# Altium PCB PCB1.PcbDoc (part 2 of 2)
Units mm, origin at the board's own origin, x right, y up, seen from the top; angles counter-clockwise.
Board outline 65.4 x 65.4 mm, 4 copper layers (Top Layer, Internal Plane 1, Signal Layer 1, Bottom Layer), stack 0.778 mm thick; 93 components, 59 nets, 348 pads, 1252 vias.
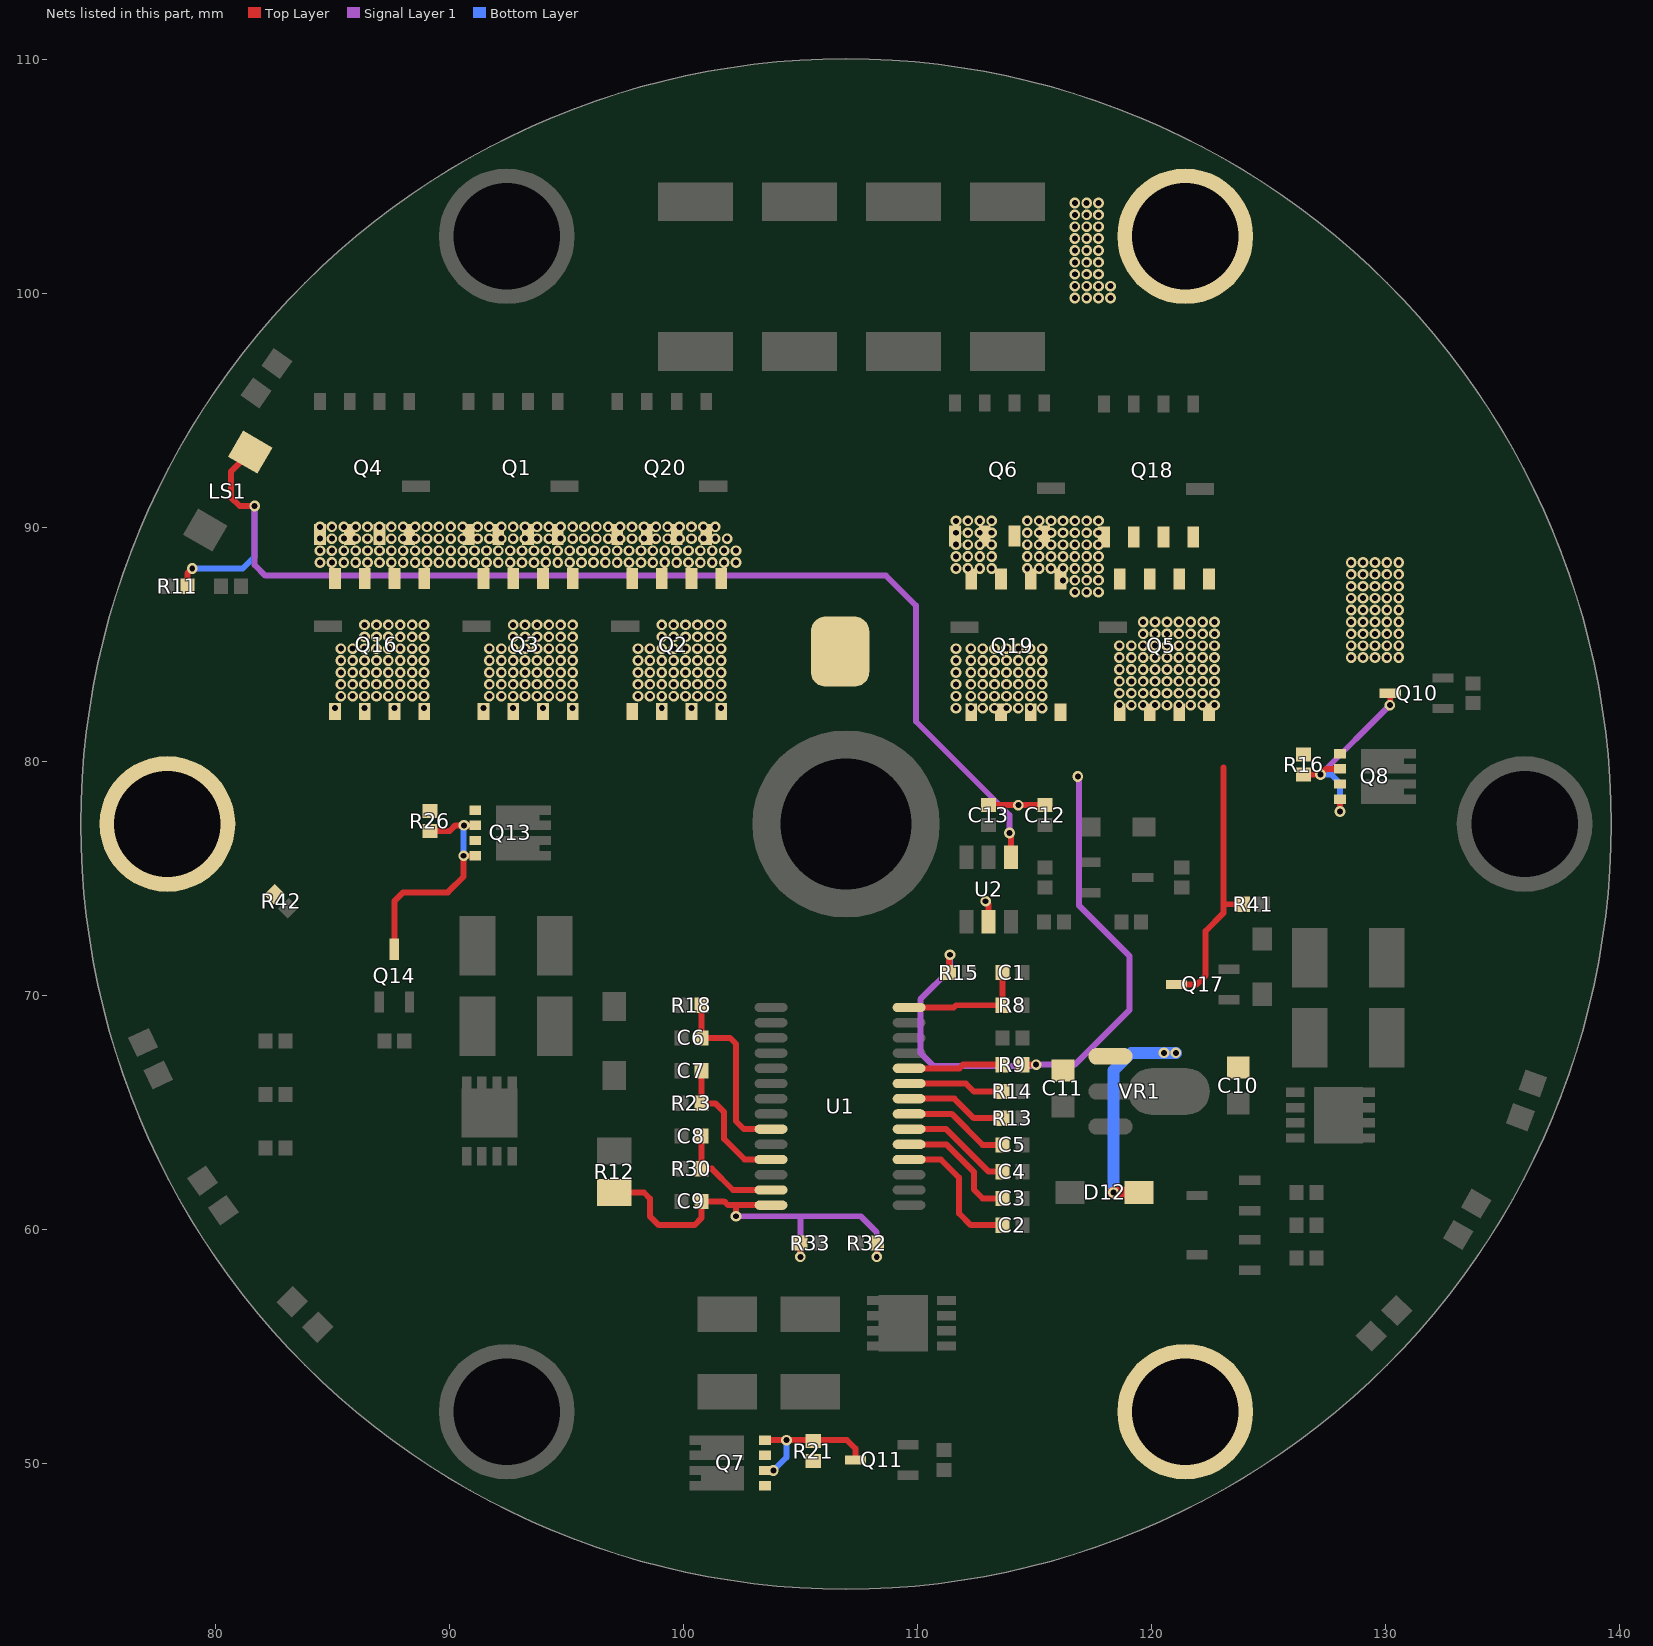
[diagram p4: the nets of this part, all layers, seen from the top]

## Via types
v1: diameter 0.457, hole 0.254, Top Layer to Bottom Layer, tented both sides, 1252 vias

## Nets (pads, with @x,y where several pads share a name; then routed paths per layer and width w, separated by ;. In a path a pad name is that pad's centre, name@x,y a point inside that pad or via, vN(x,y) a via of type N, cw(c..) or ccw(c..) an arc to the next point about the centre after c; other vN are vias at no path point) (continued)
NetLS1_1: LS1.1 R11.1 U2.4 | length 53.3
  Top Layer w0.254: R11.1@78.784,87.503 78.784,88.055 v1(78.994,88.265) ; LS1.1@81.48,93.234 80.645,92.399 80.645,91.313 81.026,90.932 v1(81.661,90.932) ; v1(113.919,76.962) 113.98,76.901 U2.4@113.98,75.924
  Signal Layer 1 w0.254: v1(81.661,90.932) 81.661,88.413 82.119,87.955 108.645,87.955 109.926,86.674 109.926,81.721 113.919,77.728 v1(113.919,76.962)
  Bottom Layer w0.254: v1(78.994,88.265) 81.153,88.265 81.661,88.773 v1(81.661,90.932)
NetQ1_5: Q1.5 Q1.6 Q1.7 Q1.8 Q2.5 Q2.6 Q2.7 Q2.8 Q3.5 Q3.6 Q3.7 Q3.8 Q4.5 Q4.6 Q4.7 Q4.8 Q5.5 Q5.6 Q5.7 Q5.8 Q6.5 Q6.6 Q6.7 Q6.8 Q16.5 Q16.6 Q16.7 Q16.8 Q18.5 Q18.6 Q18.7 Q18.8 Q19.5 Q19.6 Q19.7 Q19.8 Q20.5 Q20.6 Q20.7 Q20.8
  other v1: 116.713,87.249 117.221,87.249 117.729,87.249 116.205,87.757 116.713,87.757 117.221,87.757 117.729,87.757 111.633,88.265 112.141,88.265 112.649,88.265 113.157,88.265 114.681,88.265 115.189,88.265 115.697,88.265 116.205,88.265 116.713,88.265 117.221,88.265 117.729,88.265 84.455,88.519 84.963,88.519 85.471,88.519 85.979,88.519 86.487,88.519 86.995,88.519 87.503,88.519 88.011,88.519 88.519,88.519 89.027,88.519 89.535,88.519 90.043,88.519 90.551,88.519 91.059,88.519 91.567,88.519 92.075,88.519 92.583,88.519 93.091,88.519 93.599,88.519 94.107,88.519 94.615,88.519 95.123,88.519 95.631,88.519 96.139,88.519 96.647,88.519 97.155,88.519 97.663,88.519 98.171,88.519 98.679,88.519 99.187,88.519 99.695,88.519 100.203,88.519 100.711,88.519 101.219,88.519 101.727,88.519 102.235,88.519 111.633,88.773 112.141,88.773 112.649,88.773 113.157,88.773 114.681,88.773 115.189,88.773 115.697,88.773 116.205,88.773 116.713,88.773 117.221,88.773 117.729,88.773 84.455,89.027 84.963,89.027 85.471,89.027 85.979,89.027 86.487,89.027 86.995,89.027 87.503,89.027 88.011,89.027 88.519,89.027 89.027,89.027 89.535,89.027 90.043,89.027 90.551,89.027 91.059,89.027 91.567,89.027 92.075,89.027 92.583,89.027 93.091,89.027 93.599,89.027 94.107,89.027 94.615,89.027 95.123,89.027 95.631,89.027 96.139,89.027 96.647,89.027 97.155,89.027 97.663,89.027 98.171,89.027 98.679,89.027 99.187,89.027 99.695,89.027 100.203,89.027 100.711,89.027 101.219,89.027 101.727,89.027 102.235,89.027 111.633,89.281 112.141,89.281 112.649,89.281 113.157,89.281 114.681,89.281 115.189,89.281 115.697,89.281 116.205,89.281 116.713,89.281 117.221,89.281 117.729,89.281 84.455,89.535 84.963,89.535 85.471,89.535 85.979,89.535 86.487,89.535 86.995,89.535 87.503,89.535 88.011,89.535 88.519,89.535 89.027,89.535 89.535,89.535 90.043,89.535 90.551,89.535 91.186,89.535 91.694,89.535 92.202,89.535 92.71,89.535 93.218,89.535 93.726,89.535 94.234,89.535 94.742,89.535 95.25,89.535 95.758,89.535 96.266,89.535 96.774,89.535 97.282,89.535 97.79,89.535 98.298,89.535 98.806,89.535 99.314,89.535 99.822,89.535 100.33,89.535 100.838,89.535 101.346,89.535 101.854,89.535 111.633,89.789 112.141,89.789 112.649,89.789 113.157,89.789 114.681,89.789 115.189,89.789 115.697,89.789 116.205,89.789 116.713,89.789 117.221,89.789 117.729,89.789 84.455,90.043 84.963,90.043 85.471,90.043 85.979,90.043 86.487,90.043 86.995,90.043 87.503,90.043 88.011,90.043 88.519,90.043 89.027,90.043 89.535,90.043 90.043,90.043 90.551,90.043 91.186,90.043 91.694,90.043 92.202,90.043 92.71,90.043 93.218,90.043 93.726,90.043 94.234,90.043 94.742,90.043 95.25,90.043 95.758,90.043 96.266,90.043 96.774,90.043 97.282,90.043 97.79,90.043 98.298,90.043 98.806,90.043 99.314,90.043 99.822,90.043 100.33,90.043 100.838,90.043 101.346,90.043 111.633,90.297 112.141,90.297 112.649,90.297 113.157,90.297 114.681,90.297 115.189,90.297 115.697,90.297 116.205,90.297 116.713,90.297 117.221,90.297 117.729,90.297
NetQ7_1: Q7.1 Q7.3 R21.2
NetQ7_2: Q7.2 Q7.4 Q11.3 R21.1 | length 6.4
  Top Layer w0.254: Q7.2@103.475,49.713 v1(103.83,49.713) ; Q7.4@103.475,51.013 v1(104.394,51.013) 106.975,51.013 107.333,50.655 Q11.3@107.333,50.165
  Bottom Layer w0.254: v1(103.83,49.713) 104.394,50.277 v1(104.394,51.013)
NetQ8_1: Q8.1 Q8.3 R16.2
NetQ8_2: Q8.2 Q8.4 Q10.3 R16.1 | length 9.1
  Top Layer w0.254: R16.1@126.492,79.458 v1(127.21,79.458) 127.452,79.7 Q8.2@128.046,79.7 ; v1(128.046,77.881) Q8.4@128.046,78.4 ; v1@130.193,82.441 Q10.3@130.193,82.931
  Signal Layer 1 w0.254: v1(127.21,79.458) v1(130.175,82.423)
  Bottom Layer w0.254: v1(127.21,79.458) 127.679,79.458 128.046,79.091 v1(128.046,77.881)
NetQ13_1: Q13.1 Q13.3 R26.2
NetQ13_2: Q13.2 Q13.4 Q14.3 R26.1 | length 10.2
  Top Layer w0.254: Q14.3@87.63,71.991 87.63,74.041 88.011,74.422 89.916,74.422 90.592,75.098 v1(90.592,75.987) Q13.4@91.089,75.987 ; R26.1@89.154,77.045 89.999,77.045 90.241,77.287 v1(90.607,77.287) Q13.2@91.089,77.287
  Bottom Layer w0.254: v1(90.592,75.987) v1@90.592,77.272
NTC: R13.1 U1.8 | length 4.5
  Top Layer w0.254: U1.8@109.63,65.603 111.562,65.603 112.395,64.77 R13.1@113.621,64.77 R13.1@113.494,64.643
P-: pad.0@77.934,77.343 pad.0@106.68,84.709 pad.0@121.434,52.228 pad.0@121.434,102.458 Q2.1 Q2.2 Q2.3 Q2.4 Q3.1 Q3.2 Q3.3 Q3.4 Q5.1 Q5.2 Q5.3 Q5.4 Q16.1 Q16.2 Q16.3 Q16.4 Q17.3 Q19.1 Q19.2 Q19.3 Q19.4 R9.2 R15.2 R41.2 R42.2 | length 38.6
  Top Layer w0.254: R15.2@111.335,70.993 111.335,71.711 v1(111.379,71.755) ; R9.2@114.471,67.056 v1(115.062,67.056) ; Q17.3@121.049,70.485 121.92,70.485 122.301,70.866 122.301,72.771 123.063,73.533 123.063,73.914 ; 123.063,79.756 123.063,73.914 ; R41.2@123.908,73.914 123.063,73.914
  Signal Layer 1 w0.254: v1(111.379,71.755) 111.379,71.12 110.109,69.85 110.109,67.564 110.663,67.01 115.016,67.01 v1(115.062,67.056) 116.713,67.056 119.045,69.388 119.045,71.709 116.886,73.868 116.886,79.329 v1(116.84,79.375)
  other v1: 85.09,82.296 86.36,82.296 87.63,82.296 88.9,82.296 91.44,82.296 92.71,82.296 93.98,82.296 95.25,82.296 99.06,82.296 100.33,82.296 101.6,82.296 111.633,82.296 112.268,82.296 112.776,82.296 113.284,82.296 113.792,82.296 114.3,82.296 114.808,82.296 115.316,82.296 118.618,82.423 119.126,82.423 119.634,82.423 120.142,82.423 120.65,82.423 121.158,82.423 121.666,82.423 122.174,82.423 122.682,82.423 85.344,82.804 85.852,82.804 86.36,82.804 86.868,82.804 87.376,82.804 87.884,82.804 88.392,82.804 88.9,82.804 91.694,82.804 92.202,82.804 92.71,82.804 93.218,82.804 93.726,82.804 94.234,82.804 94.742,82.804 95.25,82.804 98.044,82.804 98.552,82.804 99.06,82.804 99.568,82.804 100.076,82.804 100.584,82.804 101.092,82.804 101.6,82.804 111.633,82.804 112.268,82.804 112.776,82.804 113.284,82.804 113.792,82.804 114.3,82.804 114.808,82.804 115.316,82.804 118.618,82.931 119.126,82.931 119.634,82.931 120.142,82.931 120.65,82.931 121.158,82.931 121.666,82.931 122.174,82.931 122.682,82.931 85.344,83.312 85.852,83.312 86.36,83.312 86.868,83.312 87.376,83.312 87.884,83.312 88.392,83.312 88.9,83.312 91.694,83.312 92.202,83.312 92.71,83.312 93.218,83.312 93.726,83.312 94.234,83.312 94.742,83.312 95.25,83.312 98.044,83.312 98.552,83.312 99.06,83.312 99.568,83.312 100.076,83.312 100.584,83.312 101.092,83.312 101.6,83.312 111.633,83.312 112.268,83.312 112.776,83.312 113.284,83.312 113.792,83.312 114.3,83.312 114.808,83.312 115.316,83.312 118.618,83.439 119.126,83.439 119.634,83.439 120.142,83.439 120.65,83.439 121.158,83.439 121.666,83.439 122.174,83.439 122.682,83.439 85.344,83.82 85.852,83.82 86.36,83.82 86.868,83.82 87.376,83.82 87.884,83.82 88.392,83.82 88.9,83.82 91.694,83.82 92.202,83.82 92.71,83.82 93.218,83.82 93.726,83.82 94.234,83.82 94.742,83.82 95.25,83.82 98.044,83.82 98.552,83.82 99.06,83.82 99.568,83.82 100.076,83.82 100.584,83.82 101.092,83.82 101.6,83.82 111.633,83.82 112.268,83.82 112.776,83.82 113.284,83.82 113.792,83.82 114.3,83.82 114.808,83.82 115.316,83.82 118.618,83.947 119.126,83.947 119.634,83.947 120.142,83.947 120.65,83.947 121.158,83.947 121.666,83.947 122.174,83.947 122.682,83.947 85.344,84.328 85.852,84.328 86.36,84.328 86.868,84.328 87.376,84.328 87.884,84.328 88.392,84.328 88.9,84.328 91.694,84.328 92.202,84.328 92.71,84.328 93.218,84.328 93.726,84.328 94.234,84.328 94.742,84.328 95.25,84.328 98.044,84.328 98.552,84.328 99.06,84.328 99.568,84.328 100.076,84.328 100.584,84.328 101.092,84.328 101.6,84.328 111.633,84.328 112.268,84.328 112.776,84.328 113.284,84.328 113.792,84.328 114.3,84.328 114.808,84.328 115.316,84.328 118.618,84.455 119.126,84.455 119.634,84.455 120.142,84.455 120.65,84.455 121.158,84.455 121.666,84.455 122.174,84.455 122.682,84.455 128.524,84.455 129.032,84.455 129.54,84.455 130.048,84.455 130.556,84.455 85.344,84.836 85.852,84.836 86.36,84.836 86.868,84.836 87.376,84.836 87.884,84.836 88.392,84.836 88.9,84.836 91.694,84.836 92.202,84.836 92.71,84.836 93.218,84.836 93.726,84.836 94.234,84.836 94.742,84.836 95.25,84.836 98.044,84.836 98.552,84.836 99.06,84.836 99.568,84.836 100.076,84.836 100.584,84.836 101.092,84.836 101.6,84.836 111.633,84.836 112.268,84.836 112.776,84.836 113.284,84.836 113.792,84.836 114.3,84.836 114.808,84.836 115.316,84.836 118.618,84.963 119.126,84.963 119.634,84.963 120.142,84.963 120.65,84.963 121.158,84.963 121.666,84.963 122.174,84.963 122.682,84.963 128.524,84.963 129.032,84.963 129.54,84.963 130.048,84.963 130.556,84.963 86.36,85.344 86.868,85.344 87.376,85.344 87.884,85.344 88.392,85.344 88.9,85.344 92.71,85.344 93.218,85.344 93.726,85.344 94.234,85.344 94.742,85.344 95.25,85.344 99.06,85.344 99.568,85.344 100.076,85.344 100.584,85.344 101.092,85.344 101.6,85.344 119.634,85.471 120.142,85.471 120.65,85.471 121.158,85.471 121.666,85.471 122.174,85.471 122.682,85.471 128.524,85.471 129.032,85.471 129.54,85.471 130.048,85.471 130.556,85.471 86.36,85.852 86.868,85.852 87.376,85.852 87.884,85.852 88.392,85.852 88.9,85.852 92.71,85.852 93.218,85.852 93.726,85.852 94.234,85.852 94.742,85.852 95.25,85.852 99.06,85.852 99.568,85.852 100.076,85.852 100.584,85.852 101.092,85.852 101.6,85.852 119.634,85.979 120.142,85.979 120.65,85.979 121.158,85.979 121.666,85.979 122.174,85.979 122.682,85.979 128.524,85.979 129.032,85.979 129.54,85.979 130.048,85.979 130.556,85.979 128.524,86.487 129.032,86.487 129.54,86.487 130.048,86.487 130.556,86.487 128.524,86.995 129.032,86.995 129.54,86.995 130.048,86.995 130.556,86.995 128.524,87.503 129.032,87.503 129.54,87.503 130.048,87.503 130.556,87.503 128.524,88.011 129.032,88.011 129.54,88.011 130.048,88.011 130.556,88.011 128.524,88.519 129.032,88.519 129.54,88.519 130.048,88.519 130.556,88.519 116.713,99.822 117.221,99.822 117.729,99.822 118.237,99.822 116.713,100.33 117.221,100.33 117.729,100.33 118.237,100.33 116.713,100.838 117.221,100.838 117.729,100.838 116.713,101.346 117.221,101.346 117.729,101.346 116.713,101.854 117.221,101.854 117.729,101.854 116.713,102.362 117.221,102.362 117.729,102.362 116.713,102.87 117.221,102.87 117.729,102.87 116.713,103.378 117.221,103.378 117.729,103.378 116.713,103.886 117.221,103.886 117.729,103.886
TOC1: C4.1 U1.6 | length 4.7
  Top Layer w0.254: U1.6@109.63,64.303 111.211,64.303 113.03,62.484 C4.1@113.621,62.484
TOC2: C5.1 U1.7 | length 4.5
  Top Layer w0.254: U1.7@109.63,64.953 111.45,64.953 112.776,63.627 C5.1@113.621,63.627
TOV: C2.1 U1.4 | length 6
  Top Layer w0.254: U1.4@109.63,63.003 110.987,63.003 111.76,62.23 111.76,60.706 112.268,60.198 C2.1@113.621,60.198
TOVD: C3.1 U1.5 | length 5.4
  Top Layer w0.254: U1.5@109.63,63.653 111.222,63.653 112.395,62.48 112.395,61.722 112.776,61.341 C3.1@113.621,61.341
TRH: R14.1 U1.9 | length 4.1
  Top Layer w0.254: U1.9@109.63,66.253 112.055,66.253 112.395,65.913 R14.1@113.621,65.913
V+: C9.2 R12.1 R32.2 R33.2 U1.28 | length 19.4
  Top Layer w0.254: R12.1@97.028,61.594 98.299,61.594 98.552,61.341 98.552,60.579 98.933,60.198 100.457,60.198 100.755,60.496 C9.2@100.755,61.214 101.727,61.214 101.888,61.053 102.235,61.053 ; v1(102.235,60.579) 102.235,61.053 ; U1.28@103.73,61.053 102.235,61.053 ; v1(104.985,58.845) R33.2@104.985,59.436 ; v1(108.248,58.845) R32.2@108.248,59.436
  Signal Layer 1 w0.254: v1(102.235,60.579) 104.902,60.579 ; v1(104.985,58.845) 104.985,60.496 104.902,60.579 ; v1(108.248,58.845) 108.248,59.9 107.569,60.579 104.902,60.579
VC1: C6.2 R18.1 U1.23 | length 7.9
  Top Layer w0.254: R18.1@100.755,69.596 C6.2@100.755,68.199 101.981,68.199 102.235,67.945 102.235,64.643 102.575,64.303 U1.23@103.73,64.303
VC2: C7.2 R23.1 U1.25 | length 6
  Top Layer w0.254: C7.2@100.755,66.802 R23.1@100.755,65.405 101.346,65.405 101.727,65.024 101.727,63.881 102.605,63.003 U1.25@103.73,63.003
VC3: C8.2 R30.1 U1.27 | length 4.7
  Top Layer w0.254: C8.2@100.755,64.008 R30.1@100.755,62.611 101.2,62.611 102.108,61.703 U1.27@103.73,61.703
VGND: C10.1 C11.1 C12.2 C13.2 D12.1 U2.2 VR1.1 | length 12.6
  Top Layer w0.254: v1(112.903,74.041) 113.03,73.914 U2.2@113.03,73.174 ; C13.2@113.03,78.149 C12.2@115.443,78.149
  Top Layer w0.508: v1(118.364,61.595) D12.1@119.458,61.595
  Bottom Layer w0.508: v1(118.364,61.595) 118.364,66.802 119.126,67.564 v1(121.031,67.564)
  other v1: 120.523,67.564 114.3,78.149
VIN: C1.1 R8.1 U1.14 | length 5.4
  Top Layer w0.254: U1.14@109.63,69.503 111.54,69.503 111.633,69.596 R8.1@113.621,69.596 C1.1@113.621,70.993
VM: R9.1 U1.10 | length 4.1
  Top Layer w0.254: U1.10@109.63,66.903 111.786,66.903 111.939,67.056 R9.1@113.621,67.056
pads on no net: U1.1 U1.13 U1.15 U1.18 U1.20

## Polygon pours and split planes (outlines as drawn)
7V4 on Top Layer "Component Side-No Net 1" (solid, remove dead copper, pour order 77): 90.17,63.627 92.329,63.627 92.329,60.198 92.583,59.944 92.71,59.817 94.615,59.817 99.06,59.817 99.695,59.182 99.822,59.055 99.822,53.467 97.409,53.467 96.52,54.356 95.123,55.753 90.043,55.753 90.043,63.5 90.17,63.627
CELL3 on Top Layer "Component Side-No Net 1" (solid, remove dead copper, pour order 76): 90.297,67.056 92.202,67.056 92.964,67.818 92.964,73.533 93.218,73.787 94.234,73.787 94.361,73.787 94.742,74.168 94.742,77.47 92.277,77.47 91.896,77.089 91.659,76.852 91.659,76.399 90.796,76.399 90.201,75.804
12VBAL on Top Layer "Component Side-No Net 1" (solid, remove dead copper, pour order 74): 90.043,63.881 94.488,63.881 95.504,64.897 95.885,65.278 95.885,68.961 95.885,73.533 95.631,73.787 93.218,73.787 93.091,73.66 92.964,73.533 92.964,71.247 92.964,67.818 92.456,67.31 92.202,67.056 90.678,67.056 90.297,67.056 90.043,66.802
NetQ13_1 on Top Layer "Component Side-No Net 1" (solid, remove dead copper, pour order 72): 88.265,78.613 91.313,78.613 91.44,78.486 91.694,78.232 91.694,76.708 91.694,76.327 91.567,76.2 91.059,75.692 90.551,75.692 88.265,75.692
3V7 on Top Layer "Component Side-No Net 1" (solid, remove dead copper, pour order 69): 110.744,56.515 114.681,56.515 114.681,54.864 110.744,54.864
7V4BAL on Top Layer "Component Side-No Net 1" (solid, remove dead copper, pour order 67): 99.822,57.404 100.076,57.404 110.617,57.404 110.617,54.737 110.49,54.61 99.822,54.61
7V4 on Top Layer "Component Side-No Net 1" (solid, remove dead copper, pour order 65): 100.33,50.165 100.347,50.148 102.783,50.148 102.783,51.475 103.124,51.816 103.251,51.943 106.68,51.943 106.934,52.197 106.934,53.594 106.934,54.102 106.68,54.356 99.695,54.356 96.901,54.356 96.393,53.848 96.139,53.594 96.139,50.292 96.393,50.292 97.536,49.149
NetQ7_1 on Top Layer "Component Side-No Net 1" (solid, remove dead copper, pour order 64): 103.124,50.673 103.251,50.546 106.045,50.546 106.045,48.387 105.918,48.26 105.791,48.133 102.616,48.133 102.616,50.673
CELL2 on Top Layer "Component Side-No Net 1" (solid, remove dead copper, pour order 62): 99.822,49.911 102.616,49.911 102.616,44.196 92.202,44.196 91.694,44.704 88.519,44.704 88.519,52.832 88.519,54.102 88.519,55.118 89.154,55.753 93.345,55.753 95.123,55.753 96.012,54.864 96.52,54.356 96.52,51.689 96.52,51.562 97.79,50.292 98.171,49.911 99.568,49.911
BAT- on Top Layer "Component Side-No Net 1" (solid, remove dead copper, pour order 61): 126.619,64.389 123.19,64.389 123.19,66.167 126.619,66.167
3V7BAL on Top Layer "Component Side-No Net 1" (solid, remove dead copper, pour order 59): 125.73,73.025 128.651,73.025 129.032,72.644 129.921,71.755 129.921,66.802 129.921,64.008 129.54,63.627 129.413,63.5 126.873,63.5 126.746,63.5 126.746,66.167 125.73,66.167 125.603,66.294
3V7 on Top Layer "Component Side-No Net 1" (solid, remove dead copper, pour order 58): 128.905,79.248 128.905,67.056 129.159,66.802 130.81,66.802 131.445,66.802 132.588,67.945 133.096,68.453 133.096,75.057 133.096,79.629 128.905,79.629
CELL1 on Top Layer "Component Side-No Net 1" (solid, remove dead copper, pour order 56): 128.778,80.899 128.778,79.629 128.905,79.502 130.81,79.502 131.572,79.502 131.953,79.121 132.207,78.867 132.207,77.089 132.207,75.184 132.842,74.549 133.096,74.295 140.462,74.295 140.462,80.772 141.224,81.534 141.097,81.407 129.286,81.407
NetQ8_1 on Top Layer "Component Side-No Net 1" (solid, remove dead copper, pour order 55): 124.587,81.026 128.524,81.026 128.524,77.724 124.587,77.724
12V on Top Layer "Component Side-No Net 1" (solid, remove dead copper, pour order 48): 91.694,78.232 91.694,76.885 94.74,76.885 94.742,76.887 94.742,75.438 96.774,75.438 96.901,75.311 98.171,74.041 98.171,72.771 98.552,72.39 110.363,72.39 110.871,72.39 111.379,72.898 111.379,75.311 111.379,78.867 109.093,81.153 108.839,81.407 106.68,81.407 104.521,81.407 103.124,80.01 101.346,78.232 101.219,78.232
BAT- on Top Layer "Component Side-No Net 1" (solid, remove dead copper, pour order 50): 89.281,104.902 89.281,98.806 97.028,98.806 116.205,98.806 116.205,106.045 116.205,110.109 115.443,110.871 114.554,111.76 88.9,111.76
ISEN_N on Top Layer "Component Side-No Net 1" (solid, remove dead copper, pour order 51): 84.074,90.805 101.727,90.805 102.489,90.043 102.616,89.916 104.267,89.916 110.617,89.916 110.998,90.297 111.506,90.805 112.522,90.805 123.063,90.805 123.063,96.012 123.063,97.028 121.539,98.552 121.285,98.806 115.951,98.806 84.455,98.806 84.074,98.425
BAT- on Top Layer "Component Side-No Net 1" (solid, remove dead copper, pour order 52): 90.17,98.679 89.916,98.425 79.121,98.425 79.121,104.394 78.74,104.775 80.645,106.68 91.694,106.68 91.694,98.933 92.075,98.552
P- on Top Layer "Component Side-No Net 1" (solid, remove dead copper, pour order 53): 72.263,71.882 72.644,72.263 80.899,72.263 83.693,75.057 84.328,75.692 88.265,75.692 88.265,78.613 90.932,78.613 91.515,78.613 91.896,78.232 101.346,78.232 104.521,81.407 108.839,81.407 111.379,78.867 111.425,78.913 124.662,78.913 124.662,81.026 124.587,81.101 124.587,84.963 124.587,86.233 124.206,86.614 115.824,86.614 74.041,86.614 72.517,85.09
P- on Top Layer "Component Side-No Net 1" (solid, remove dead copper, pour order 54): 102.489,86.233 102.489,87.884 110.871,87.884 110.871,86.36 110.871,83.947 110.109,83.185 109.855,83.439 102.235,83.439
NetQ1_5 on Top Layer "Component Side-No Net 1" (solid, remove dead copper, pour order 57): 83.82,90.424 83.82,86.741 123.063,86.741 123.063,90.551 122.809,90.805 84.074,90.805
P- on Top Layer "Component Side-No Net 1" (solid, remove dead copper, pour order 60): 124.46,81.153 128.905,81.153 129.54,81.788 129.54,84.836 129.54,104.013 128.778,104.775 123.063,110.49 113.919,110.49 113.919,81.661 114.427,81.153
VGND on Top Layer "Component Side-No Net 1" (solid, remove dead copper, pour order 71): 115.57,66.294 117.094,66.294 117.475,66.675 118.872,66.675 118.999,66.675 119.38,67.056 122.047,67.056 122.301,67.056 122.936,66.421 124.46,66.421 125.349,66.421 125.476,66.548 125.476,68.199 125.476,68.453 125.349,68.58 115.57,68.58
BAT- on Top Layer "Component Side-No Net 1" (solid, remove dead copper, pour order 73): 117.094,66.294 117.094,65.024 118.745,65.024 118.999,65.024 119.507,64.516 119.507,63.881 119.507,63.627 125.095,63.627 125.539,63.627 125.665,63.753 125.417,64.001 125.417,67.121 117.41,67.121 117.094,67.437
B3V on Top Layer "Component Side-No Net 1" (solid, remove dead copper, pour order 75): 115.57,66.04 115.697,65.913 116.967,65.913 116.967,65.151 117.221,64.897 117.348,65.024 118.999,65.024 118.999,64.812 119.507,64.304 119.507,63.627 115.316,63.627 115.062,63.881 115.062,66.04
P- on Top Layer "Component Side-No Net 1" (solid, remove dead copper, pour order 78): 126.746,81.28 143.129,81.28 144.145,82.296 144.907,83.058 144.907,95.885 144.907,101.6 141.605,104.902 140.208,106.299 122.174,106.299 122.174,84.709 125.222,81.661
BAT- on Top Layer "Component Side-No Net 1" (solid, remove dead copper, pour order 49): 68.707,40.005 68.961,40.259 151.765,40.259 151.765,82.677 151.638,82.804 151.13,82.296 41.529,82.296
3V7 on Bottom Layer "Component Side-No Net 1" (solid, remove dead copper, pour order 70): 132.588,72.517 132.588,61.595 130.048,59.055 128.143,57.15 124.079,57.15 118.237,57.15 116.459,55.372 116.078,54.991 112.649,54.991 111.76,54.991 111.506,55.245 111.506,56.388 111.506,56.642 111.633,56.769 111.76,56.896 112.268,56.896 114.808,56.896 115.697,57.785 117.729,59.817 120.015,59.817 126.746,59.817 128.905,61.976 130.556,63.627 130.556,72.39 130.81,72.644 132.461,72.644
12V on Bottom Layer "Component Side-No Net 1" (solid, remove dead copper, pour order 63): 104.521,81.407 108.839,81.407 108.966,81.407 111.379,78.994 111.379,74.803 111.379,73.406 110.363,72.39 106.553,72.39 104.267,72.39 102.489,74.168 101.346,75.311 101.346,78.232
P- on Bottom Layer "Component Side-No Net 1" (solid, remove dead copper, pour order 66): 74.402,73.924 79.766,73.924 82.423,76.581 83.683,77.841 88.265,77.841 91.958,77.841 92.329,77.47 102.108,77.47 109.855,77.47 111.379,78.994 111.506,78.867 127.254,78.867 127.254,81.446 127.21,81.49 128.143,82.423 128.524,82.423 130.175,82.423 141.478,82.423 141.478,95.631 138.811,98.298 128.397,108.712 123.571,108.712 116.586,108.712 116.459,108.585 116.459,98.933 121.285,98.933 123.063,97.155 123.19,97.028 123.19,94.107 123.19,86.868 122.936,86.614 122.682,86.614 116.967,86.614 73.66,86.614 73.533,86.741
P- on Bottom Layer "Component Side-No Net 1" (solid, remove dead copper, pour order 68): 126.238,78.867 131.699,78.867 131.699,83.043 131.714,83.058 131.079,83.693 119.634,83.947
NetQ1_5 on Bottom Layer "Component Side-No Net 1" (solid, remove dead copper, pour order 85): 83.82,90.678 117.983,90.678 118.11,90.551 118.11,86.614 118.11,85.979 117.749,86.34 83.947,86.34
P- on Bottom Layer "Component Side-No Net 1" (solid, remove dead copper, pour order 86): 118.11,86.233 118.11,90.551 118.074,90.587 118.11,90.551 126.873,90.551 126.873,84.455 126.619,84.201 125.095,82.677 117.602,82.677
ISEN_N on Bottom Layer "Component Side-No Net 1" (solid, remove dead copper, pour order 87): 83.824,90.551 83.824,96.397 86.106,98.679 86.36,98.679 107.061,98.679 121.666,98.679 123.698,96.647 124.079,96.266 124.079,89.916 90.043,89.916 89.916,89.789
BAT- on Bottom Layer "Component Side-No Net 1" (solid, remove dead copper, pour order 88): 60.198,43.307 63.627,39.878 139.954,39.878 142.113,39.878 150.368,48.133 151.638,49.403 151.638,112.268 101.473,112.268 86.233,127.508 64.77,106.045 64.77,105.156
BAT- on Bottom Layer "Component Side-No Net 1" (solid, remove dead copper, pour order 89): 83.439,109.728 86.106,107.061 86.106,97.79 97.155,97.79 97.663,97.282 97.536,97.409 97.536,113.03
3V7 on Signal Layer 1 "Component Side-No Net 1" (solid, remove dead copper, pour order 84): 130.429,73.279 132.588,73.279 132.969,72.898 132.715,72.644 132.715,67.564 130.556,67.564 130.429,67.691
BAT- on Signal Layer 1 "Component Side-No Net 1" (solid, remove dead copper, pour order 83): 122.301,66.802 122.428,66.675 126.746,66.675 126.746,64.516 126.365,64.135 122.047,64.135
P- on Signal Layer 1 "Component Side-No Net 1" (solid, remove dead copper, pour order 79): 118.364,91.694 136.271,91.694 142.621,91.694 143.51,90.805 145.034,61.595 138.049,51.689 135.382,51.689 132.842,49.149 128.651,44.958 118.364,44.958 118.364,58.42 120.015,60.071 121.539,61.595 121.539,69.723 125.095,73.279 125.095,75.438 118.745,75.438 117.505,76.678 117.505,85.755 118.267,85.755 118.364,85.852
P- on Signal Layer 1 "Component Side-No Net 1" (solid, remove dead copper, pour order 80): 75.824,87.451 75.875,87.503 102.362,87.503 102.362,82.169 101.346,81.153 98.806,78.613 95.25,78.613 90.551,78.613 89.789,77.851 87.63,75.692 84.709,75.692 84.455,75.692 80.899,72.136 80.772,72.263 69.85,72.263 69.85,85.598 70.104,85.852
NetQ1_5 on Signal Layer 1 "Component Side-No Net 1" (solid, remove dead copper, pour order 81): 107.061,98.425 107.188,98.298 107.823,98.298 108.331,97.79 108.331,92.583 109.22,91.694 118.364,91.694 118.364,77.536 117.505,76.678 116.84,77.343 116.124,77.343 116.124,86.914 115.788,87.249 110.871,87.249 108.712,89.408 107.569,89.408 107.061,89.916
NetQ1_5 on Signal Layer 1 "Component Side-No Net 1" (solid, remove dead copper, pour order 82): 84.074,87.955 84.074,90.297 84.201,90.424 102.108,90.424 102.235,90.424 102.997,89.662 102.997,87.955
ISEN_N on Signal Layer 1 "Component Side-No Net 1" (solid, remove dead copper, pour order 90): 108.331,97.79 110.617,97.79 111.379,98.552 117.602,98.552 117.729,98.425 117.856,98.298 117.856,96.647 118.237,96.266 118.364,96.139 122.936,96.139 122.936,91.821 122.809,91.694 109.22,91.694 108.331,92.583
ISEN_N on Signal Layer 1 "Component Side-No Net 1" (solid, remove dead copper, pour order 91): 89.281,91.821 84.455,91.821 84.455,95.25 85.09,95.885 85.598,96.393 94.488,96.393 95.123,96.393 95.504,96.774 95.758,97.028 95.758,98.552 102.362,98.552 102.489,98.425 102.87,98.044 105.918,98.044 105.918,92.964 104.981,92.027 104.981,91.773
P- on Signal Layer 1 "Component Side-No Net 1" (solid, remove dead copper, pour order 92): 116.332,98.552 116.332,109.855 116.84,110.363 116.967,110.49 129.921,110.49 129.921,106.807 137.795,98.933 139.573,97.155 139.573,87.503 120.396,87.503 120.015,87.884
BAT- on Signal Layer 1 "Component Side-No Net 1" (solid, remove dead copper, pour order 93): 59.182,38.481 59.309,38.354 150.495,38.354 150.495,111.633 150.749,111.887 144.78,117.856 56.515,117.856
VGND on Signal Layer 1 "Component Side-No Net 1" (solid, remove dead copper, pour order 94): 119.507,66.548 123.044,66.548 123.278,66.315 122.428,67.164 122.428,70.993 117.856,70.993 117.602,70.739
ISEN_N on Internal Plane 1 (split plane): 118.516,98.129 118.516,96.901 118.524,96.862 118.546,96.829 119.181,96.194 119.214,96.172 119.253,96.164 122.513,96.164 122.961,95.716 122.961,91.99 122.767,91.796 111.802,91.796 111.591,92.008 111.379,92.219 111.379,95.656 111.379,96.114 111.371,96.153 111.349,96.186 111.1,96.435 111.1,98.383 111.523,98.806 117.839,98.806
NetQ1_5 on Internal Plane 1 (split plane): 111.688,91.622 111.721,91.6 111.76,91.592 118.897,91.592 118.897,87.291 118.322,86.716 112.395,86.716 112.356,86.708 112.323,86.686 112.204,86.568 110.846,87.926 110.846,91.144 111.506,91.804
P- on Internal Plane 1 (split plane): 162 vertices, not listed, extent 110.973,46.815 139.126,107.868
VGND on Internal Plane 1 (split plane): 121.539,76.564 121.539,67.437 121.133,67.031 120.184,67.031 119.736,67.479 119.736,75.438 119.728,75.477 119.706,75.51 119.325,75.891 119.292,75.913 119.253,75.921 116.967,75.921 116.928,75.913 116.895,75.891 116.163,75.159 114.3,75.159 114.261,75.151 114.228,75.129 113.72,74.621 113.698,74.588 113.69,74.549 113.69,72.686 113.496,72.492 111.802,72.492 111.608,72.686 111.608,78.444 111.929,78.765 119.338,78.765
NetQ1_5 on Internal Plane 1 (split plane): 103.022,89.62 103.022,87.037 102.362,86.377 102.037,86.702 102.004,86.725 101.965,86.732 83.922,86.732 83.922,90.382 84.497,90.957 101.685,90.957
ISEN_N on Internal Plane 1 (split plane): 85.018,98.861 85.051,98.839 85.09,98.831 102.447,98.831 102.895,98.383 102.895,96.054 102.417,95.576 102.395,95.543 102.387,95.504 102.387,90.543 101.799,91.131 101.766,91.153 101.727,91.161 84.455,91.161 84.416,91.153 84.383,91.131 83.748,90.496 83.726,90.463 83.718,90.424 83.718,86.732 76.142,86.732 76.367,87.441 76.624,88.188 76.899,88.929 77.193,89.662 77.504,90.388 77.833,91.107 78.179,91.817 78.543,92.518 78.924,93.21 79.322,93.893 79.737,94.566 80.167,95.228 80.614,95.879 81.077,96.52 81.556,97.148 82.049,97.765 82.558,98.37 83.081,98.962 83.619,99.541 83.974,99.905
BAT- on Internal Plane 1 (split plane): 257 vertices, not listed, extent 75.164,45.151 125.501,109.535
P- on Internal Plane 1 (split plane): 102.26,86.191 102.26,81.068 100.415,79.223 91.059,79.223 91.02,79.215 90.987,79.193 87.715,75.921 84.328,75.921 84.289,75.913 84.256,75.891 80.73,72.365 75.131,72.365 75.091,72.619 74.984,73.402 74.897,74.188 74.829,74.975 74.781,75.763 74.752,76.553 74.742,77.322 74.744,77.343 74.742,77.364 74.752,78.133 74.781,78.923 74.829,79.711 74.897,80.498 74.984,81.284 75.091,82.067 75.216,82.847 75.361,83.623 75.524,84.396 75.707,85.165 75.908,85.929 76.082,86.528 101.922,86.528

## Keep-outs
Keep-Out Layer:
  circle w0.254: c106.934,77.343 r32.7

## Other copper
Internal Plane 1 (plane layer: these items are gaps in the copper):
  rectangle: 112.014,78.867 119.38,80.137
  lines w0.2: 74.295,72.263 80.772,72.263 84.328,75.819 87.757,75.819 91.059,79.121 100.457,79.121 102.362,81.026 102.362,86.233 ; 75.581,86.63 101.965,86.63 102.362,86.233 ; 83.693,100.33 85.09,98.933 102.489,98.933 102.997,98.425 102.997,96.012 102.489,95.504 102.489,90.297 ; 83.82,86.63 83.82,90.424 84.455,91.059 101.727,91.059 103.124,89.662 103.124,86.995 102.362,86.233 ; 111.519,91.935 111.493,91.935 110.744,91.186 110.744,87.884 112.141,86.487 ; 115.951,98.908 115.951,99.264 115.951,104.14 116.586,104.775 116.586,107.442 117.475,108.331 ; 117.042,46.233 117.042,55.066 119.38,57.404 119.38,61.849 121.158,63.627 124.968,63.627 125.603,64.262 125.603,79.629 125.095,80.137 112.014,80.137 110.871,81.28 110.871,85.09 112.395,86.614 118.364,86.614 118.999,87.249 118.999,91.694 ; 110.998,96.393 111.277,96.114 111.277,95.656 111.277,92.177 111.76,91.694 122.809,91.694 123.063,91.948 123.063,95.758 122.555,96.266 119.253,96.266 118.618,96.901 118.618,98.171 117.881,98.908 111.481,98.908 110.998,98.425 110.998,96.393 ; 111.506,72.644 111.76,72.39 113.538,72.39 113.792,72.644 113.792,74.549 114.3,75.057 116.205,75.057 116.967,75.819 119.253,75.819 119.634,75.438 119.634,67.437 120.142,66.929 121.175,66.929 121.641,67.395 121.641,76.606 119.38,78.867 111.887,78.867 111.506,78.486 111.506,72.644

## Silkscreen, mask and mechanical layers (free items; w line width, h text height)
Top Overlay:
  rectangle: 111.48,74.049 112.014,75.049
  lines w0.254: 75.137,69.709 84.469,69.709 86.106,68.072 86.106,52.197 ; 127.889,52.959 127.889,61.214 130.429,63.754 130.429,65.786 132.334,67.691 137.668,67.691
  text "P-" at 124.714,101.092 h2.5
  text "B-" at 86.995,100.711 h2.5
  text "R003" at 98.806,100.076 h1.6
  text "R003" at 103.378,100.076 h1.6
  text "R003" at 107.823,100.076 h1.6
  text "R003" at 112.395,100.076 h1.6
  text "C-" at 107.442,87.122 h2.54 r90
  text "电池全反了！" at 76.073,85.344 h1.52
  text "2025/10/24" at 132.461,84.455 h2.5 r90
  text "V1.0" at 134.62,84.455 h2.5 r90
  text "P-" at 81.915,78.74 h2.5
  text "CELL3" at 95.631,76.454 h2.5
  text "CELL1" at 125.984,75.184 h2.5
  text "(+12V)" at 95.631,74.295 h2.54
  text "RUVP" at 84.328,73.533 h2
  text "GT96-3S2P-Li-PROT" at 97.282,72.009 h1.52
  text "电池" at 133.096,71.501 h3
  text "With True RevProt" at 97.663,70.739 h1.6
  text "均衡指示" at 75.438,70.358 h2.5
  text "烫" at 117.475,70.104 h2
  text "装反" at 132.842,68.707 h3
  text "B3" at 78.359,67.691 h2
  text "B3" at 132.715,65.151 h2
  text "BM3451" at 107.315,62.611 h2 r90
  text "B2" at 81.661,61.087 h2
  text "B2" at 129.794,60.325 h2
  text "B1" at 83.693,58.166 h2
  text "CELL2" at 88.9,58.039 h2.5
  text "B1" at 128.27,57.785 h2
  text "Designed By:" at 112.395,57.023 h1.6
  text "(7V4)" at 89.535,55.88 h2.5
  text "Redstoner_35" at 112.395,55.245 h2
  text "P-" at 124.841,52.07 h2.5
  text "Reverse Polarity" at 107.696,51.943 h1.6
  text "Protected" at 112.141,50.292 h1.6
  text "立即全拆电池！" at 98.806,48.895 h1.52 r90
  text "注意：听到蜂鸣警报" at 97.028,47.371 h1.52 r90
  text "FarBeaMon3tr" at 100.584,46.355 h3
Bottom Overlay:
  circle w0.254: c106.934,77.343 r18.5
  circle w7: c106.934,77.216 r15
  text "PCB GT96-3SLiPROTwTRP V1.0" at 117.348,99.441 h1.6
  text "Designed by: redstoner_35" at 115.062,97.663 h1.6
  text "JLCJLCJLCJLC" at 111.76,83.693 h1.6
Top Solder:
  rectangle: 98.553,105.41 106.553,107.41
  rectangle: 107.823,105.41 115.823,107.41
  region: 97.917,99.314 97.917,107.314 95.917,107.314 95.917,99.314
  rectangle: 102.616,90.043 110.616,96.043
  region: 98.043,98.425 90.043,98.425 90.043,96.425 98.043,96.425
  region: 84.281,98.425 84.281,96.425 89.281,96.425 89.281,98.425
  region: 121.412,96.425 121.412,98.425 116.412,98.425 116.412,96.425
  region: 105.029,81.788 105.029,87.788 102.529,87.788 102.529,81.788
  region: 110.744,81.788 110.744,87.788 108.244,87.788 108.244,81.788
  region: 127.952,81.28 127.952,91.28 123.952,91.28 123.952,81.28
  region: 128.016,91.806 128.016,98.806 124.016,98.806 124.016,91.806
  rectangle: 93.599,79.026 101.599,81.026
  rectangle: 85.217,79.026 93.217,81.026
  rectangle: 76.073,80.772 83.073,84.772
  region: 81.661,78.2 81.661,76.2 86.661,76.2 86.661,78.2
  rectangle: 111.506,79.121 119.506,81.121
  region: 120.015,81.121 120.015,79.121 124.015,79.121 124.015,81.121
  lines w2: 92.434,102.458 92.868,102.458 94.996,100.33 96.52,100.33 ; 121.434,102.458 126.043,97.849 125.095,96.901